# EAGLE board power electronics7 (EAGLE 9.2.2)
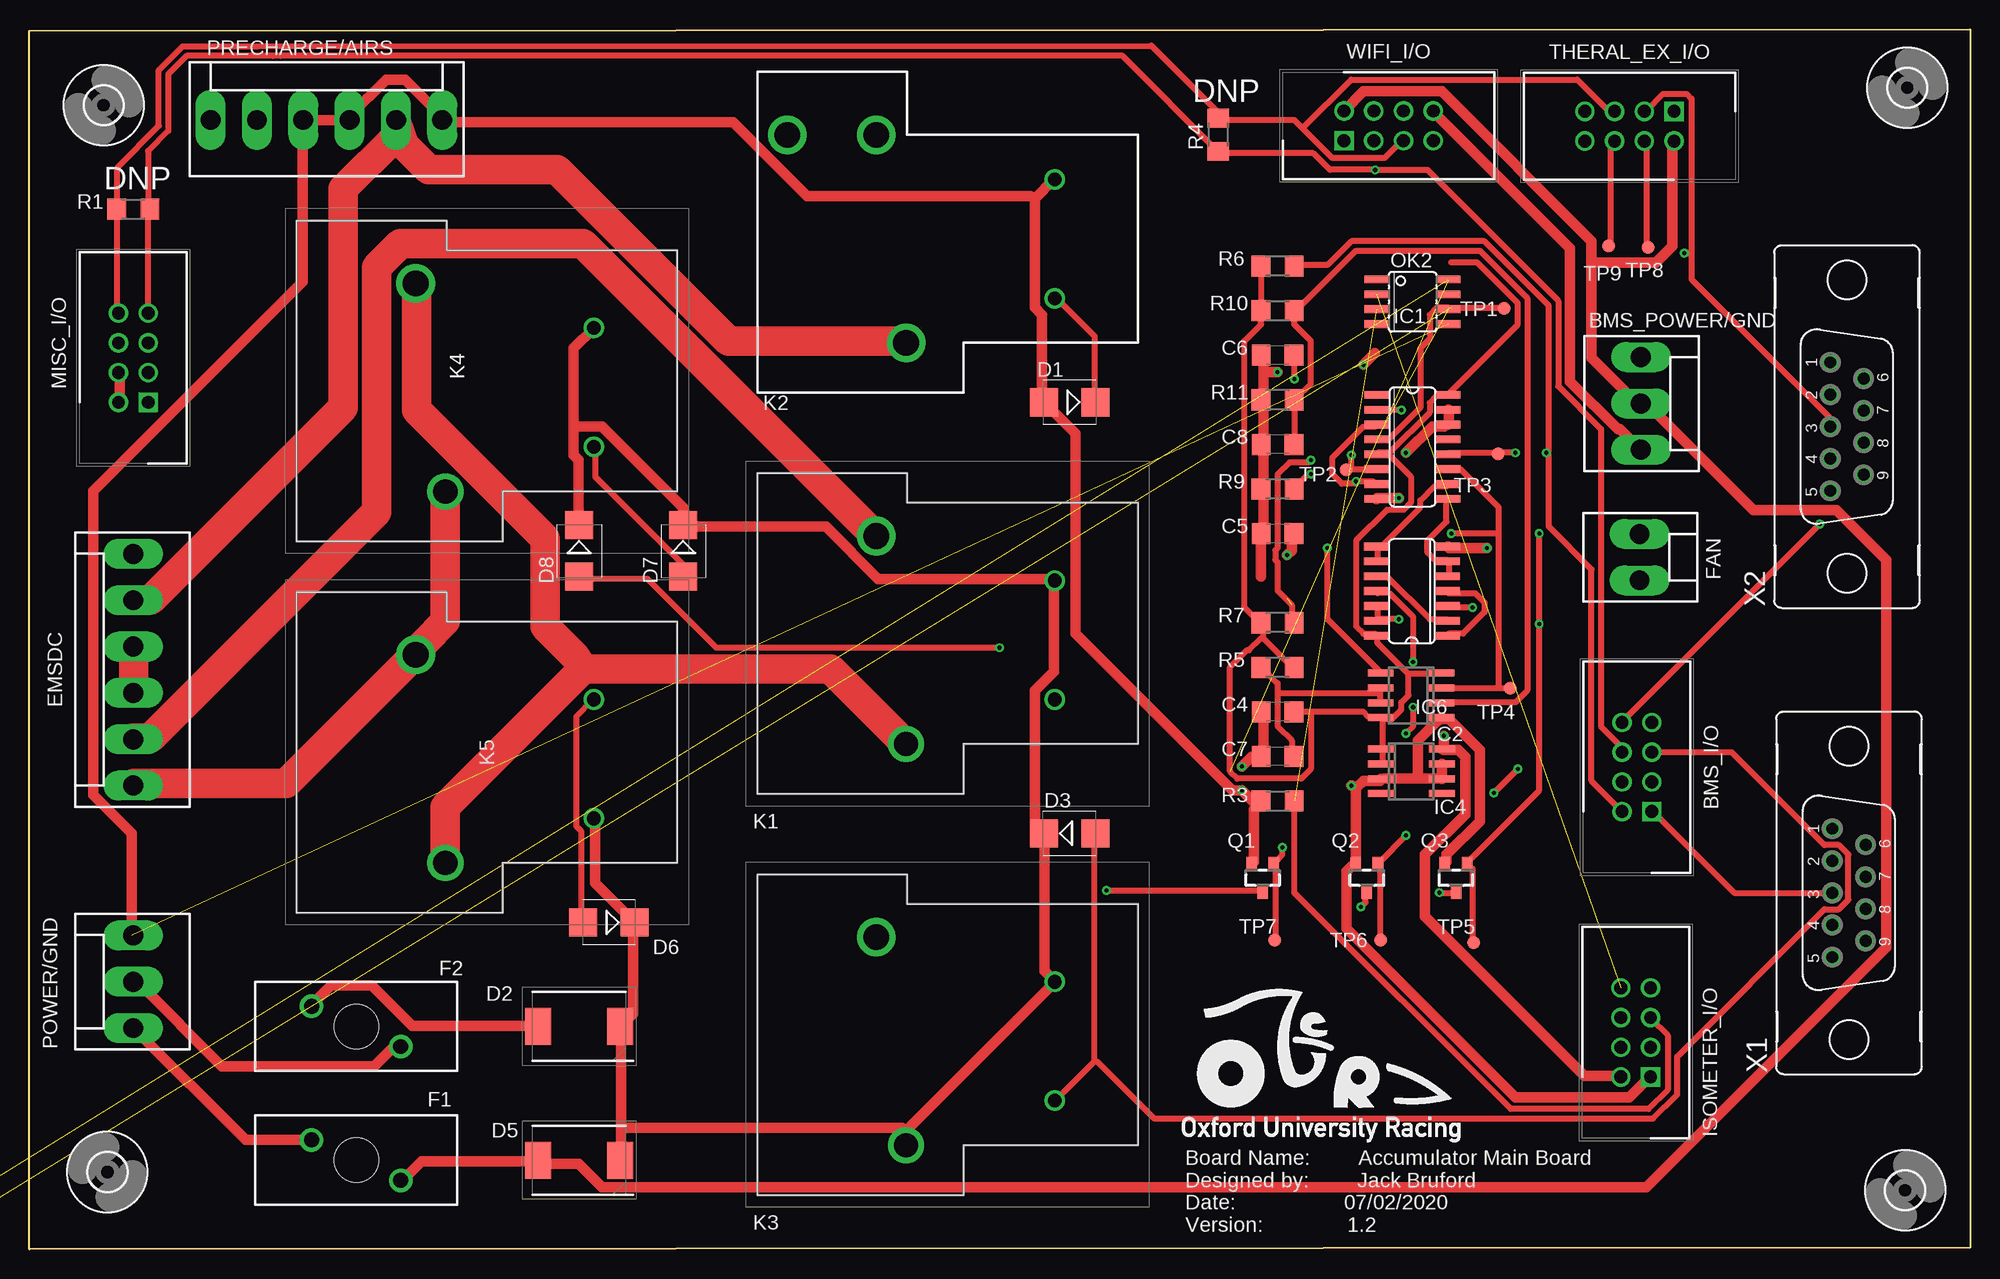
[diagram p0: board, top side]
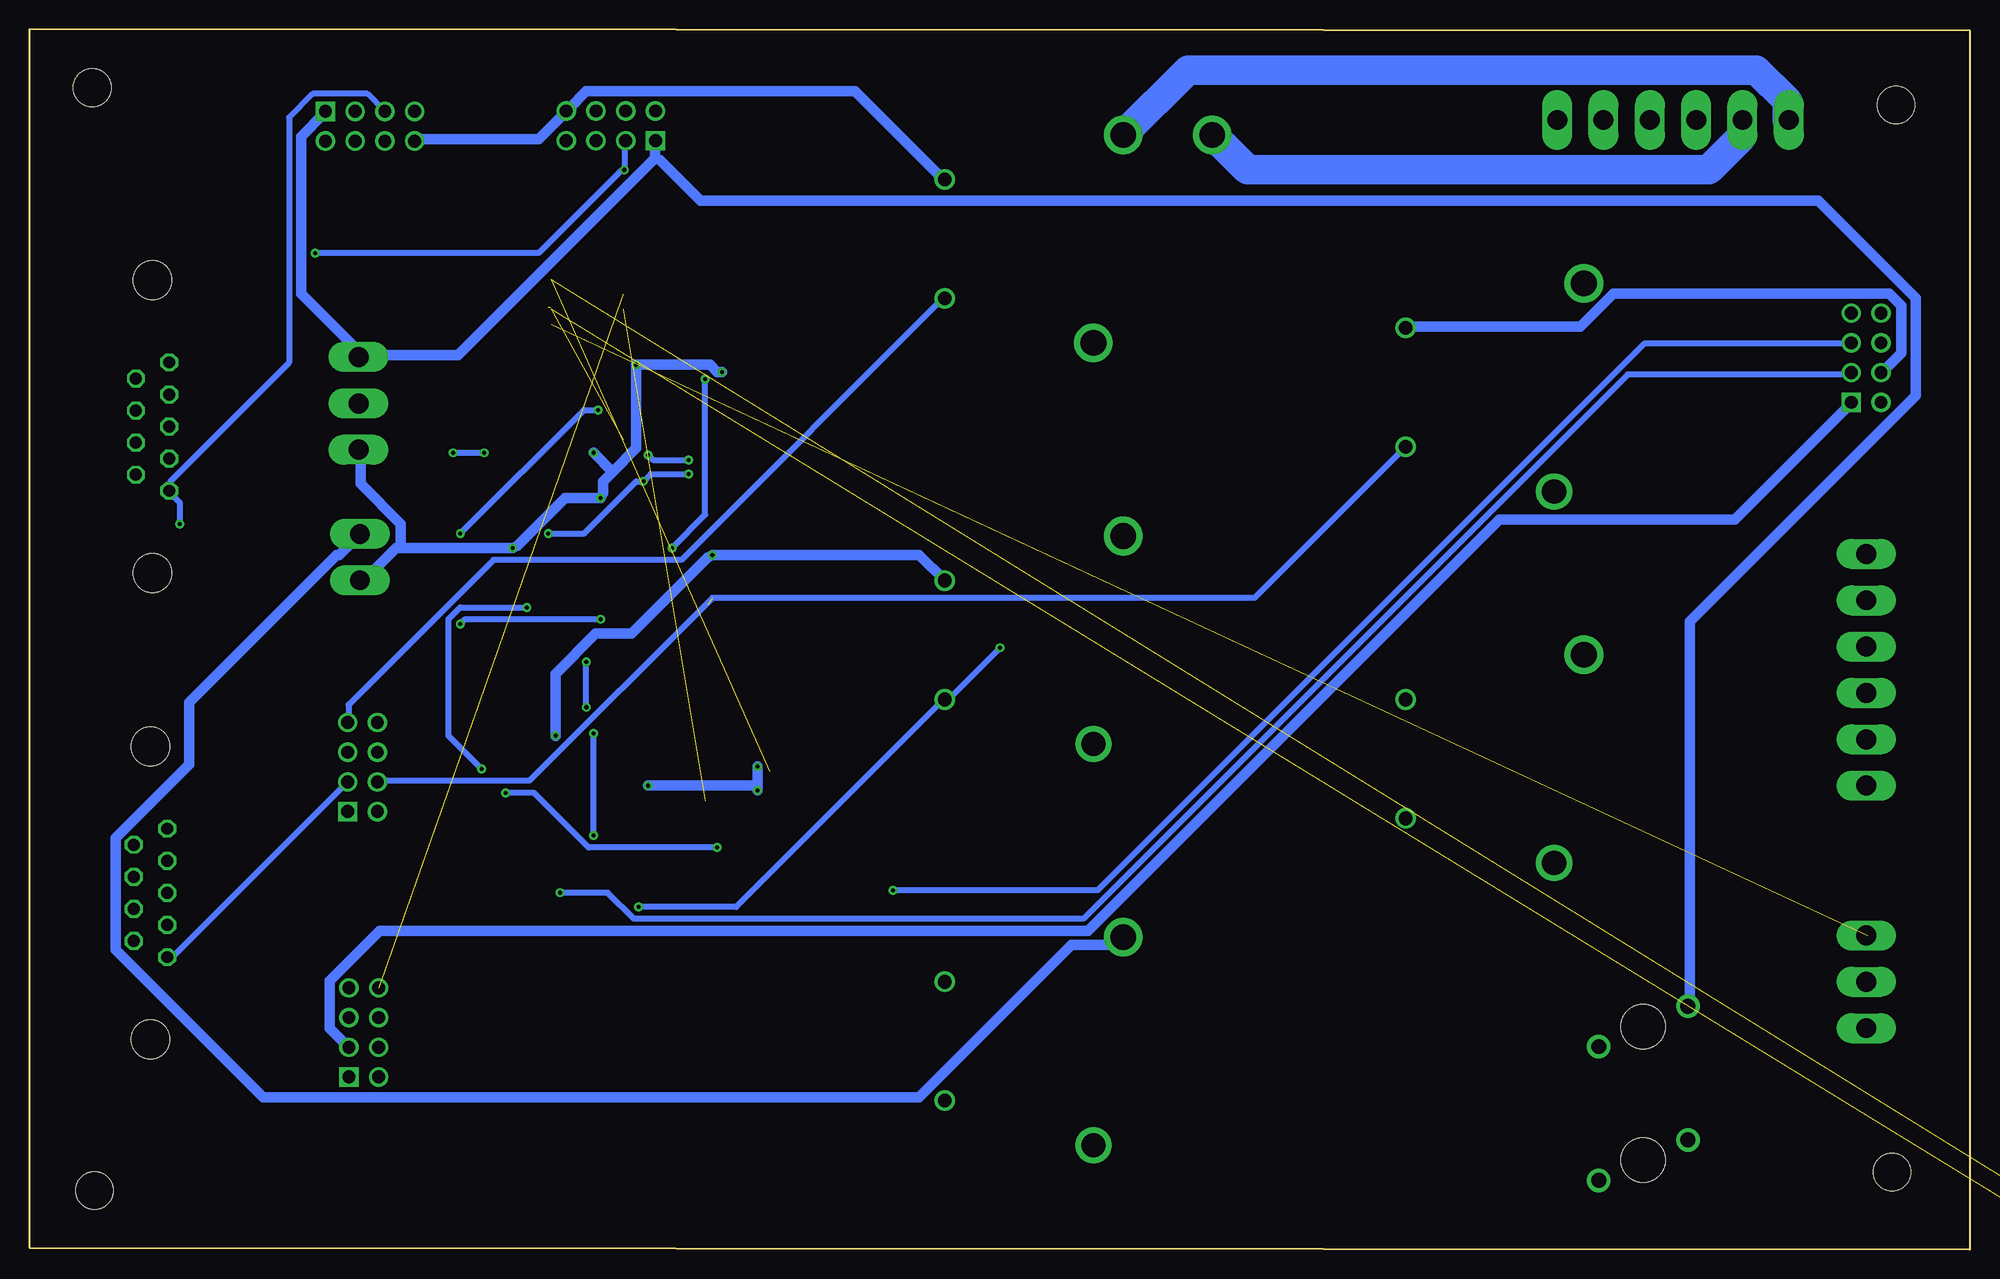
[diagram p1: board, bottom side, seen from below]

Size 165.87 x 104.27 mm. Coordinates in mm from the lower left corner, seen from the top.
Outline: 0,0 0,104.14 165.87,104.27 165.87,0.13 0,0
Copper layers (1*16): Top 0.035mm / dielectric 1.5mm / Bottom 0.035mm
Design rules "default *": minimum track width 6mil, minimum drill 0.35mm, track to track 12mil, track to pad 12mil, pad to pad 12mil, via to via 12mil, smd to smd 0mil, copper to edge 40mil, drill to drill 6mil, minimum pad ring 10mil, minimum via ring 8mil, stop-mask expansion 4mil, vias tented up to drill 0mil, thermal gap 10mil
Net classes: 0 default: width 0.508 mm; 1 GND: width 0.889 mm; 2 EMSDC: width 2.54 mm; 3 power: width 0.889 mm

## Footprints (pad centres in the part's own frame; a part is rotated, then mirrored left to right if it is on the bottom)
HDRV8W64P254_2X4_1778X895X915P = drill 1.1 pad 1.65 square: 1 0,0 | drill 1.1 pad 1.65: 2 0,2.54; 3 2.54,0; 4 2.54,2.54; 5 5.08,0; 6 5.08,2.54; 7 7.62,0; 8 7.62,2.54
KK-156-3 = drill 1.7 pad 2.184 long: 1 -3.96,0; 2 0,0; 3 3.96,0
C1206 = smd 1.6 x 1.8: 1 -1.4,0; 2 1.4,0
SMB = smd 2.4 x 2.4: A 2.2,0; C -2.2,0
DIOM7959X262N = smd 2.2 x 3.15: 1 -3.5,0; 2 3.5,0
KK-156-6 = drill 1.7 pad 2.184 long: 1 -9.9,0; 2 -5.94,0; 3 -1.98,0; 4 1.98,0; 5 5.94,0; 6 9.9,0
01530008 = drill 1.27 pad 2: 1 1.727,3.81; 2 -1.727,-3.81 | hole 3.785: 0,0
KK-156-2 = drill 1.7 pad 2.184 long: 1 -1.98,0; 2 1.98,0
3,2 = hole 3.2: 0,0
SO16 = smd 0.66 x 2.032: 1 -4.445,-3.073; 2 -3.175,-3.073; 3 -1.905,-3.073; 4 -0.635,-3.073; 5 0.635,-3.073; 6 1.905,-3.073; 7 3.175,-3.073; 8 4.445,-3.073; 9 4.445,3.073; 10 3.175,3.073; 11 1.905,3.073; 12 0.635,3.073; 13 -0.635,3.073; 14 -1.905,3.073; 15 -3.175,3.073; 16 -4.445,3.073
SO08 = smd 0.6 x 2.2: 1 -1.905,-2.6; 2 -0.635,-2.6; 3 0.635,-2.6; 4 1.905,-2.6; 5 1.905,2.6; 6 0.635,2.6; 7 -0.635,2.6; 8 -1.905,2.6
SOIC8 = smd 0.6 x 2.2: 1 -1.905,-2.6; 2 -0.635,-2.6; 3 0.635,-2.6; 4 1.905,-2.6; 5 1.905,2.6; 6 0.635,2.6; 7 -0.635,2.6; 8 -1.905,2.6
SO14 = smd 0.66 x 2.032: 1 -3.81,-3.073; 2 -2.54,-3.073; 3 -1.27,-3.073; 4 0,-3.073; 5 1.27,-3.073; 6 2.54,-3.073; 7 3.81,-3.073; 8 3.81,3.073; 9 2.54,3.073; 10 1.27,3.073; 11 0,3.073; 12 -1.27,3.073; 13 -2.54,3.073; 14 -3.81,3.073
T9AS1D1248T9A = drill 1.17 pad 1.755: 1 0,0; 2 -10.16,0 | drill 2.06 pad 3.09: 3 -13.97,12.7 | drill 2.19 pad 3.3: 4 3.81,15.24
T9AS1D12 = drill 2.19 pad 3.29: 1 -8.89,12.7; 2 8.89,15.24; 3 8.89,22.86 | drill 1.17 pad 1.77: 4 -5.08,0; 5 5.08,0
SOIC08 = smd 0.66 x 2.032: 1 -1.905,-3.073; 2 -0.635,-3.073; 3 0.635,-3.073; 4 1.905,-3.073; 5 1.905,3.073; 6 0.635,3.073; 7 -0.635,3.073; 8 -1.905,3.073
SOT23 = smd 0.9 x 1.2: 1 -0.95,-1.2; 2 0.95,-1.2; 3 0,1.2
R1206 = smd 1.6 x 1.803: 1 -1.422,0; 2 1.422,0
TP11R = smd 1.1 x 1.1: TP 0,0
F09V = drill 1.016 octagon: 1 5.486,1.422; 2 2.743,1.422; 3 0,1.422; 4 -2.743,1.422; 5 -5.486,1.422; 6 4.115,-1.422; 7 1.372,-1.422; 8 -1.372,-1.422; 9 -4.115,-1.422 | hole 3.302: -12.522,0; 12.522,0

## Placement (x,y rotation side)
BMS_I/O  T821108A1S100CEU  [HDRV8W64P254_2X4_1778X895X915P]  138.65,37.41 90 top
BMS_POWER/GND  [KK-156-3]  137.73,72.29 270 top
C4  3.3uF  [C1206]  106.68,45.93 180 top
C5  1uF  [C1206]  106.68,61.17 180 top
C6  0.1uF  [C1206]  106.68,76.41 180 top
C7  22uF  [C1206]  106.68,42.12 180 top
C8  10uF  [C1206]  106.68,68.79 180 top
D1  ES2D  [SMB]  88.9,72.39 180 top
D2  VS-30BQ100-M3_9AT  [DIOM7959X262N]  46.99,19.05 180 top
D3  ES2D  [SMB]  88.9,35.56 0 top
D5  VS-30BQ100-M3_9AT  [DIOM7959X262N]  46.99,7.62 180 top
D6  ES2D  [SMB]  49.53,27.94 180 top
D7  ES2D  [SMB]  55.88,59.69 270 top
D8  ES2D  [SMB]  46.99,59.69 270 top
EMSDC  [KK-156-6]  8.89,49.53 90 top
F1  01530008Z  [01530008]  27.94,7.62 270 top
F2  01530008Z  [01530008]  27.94,19.05 90 top
FAN  [KK-156-2]  137.61,59.16 270 top
H1  MOUNT-HOLE3.2  [3,2]  160.3,5.04 0 top
H2  MOUNT-HOLE3.2  [3,2]  160.49,99.28 0 top
H3  MOUNT-HOLE3.2  [3,2]  6.68,6.6 90 top
H4  MOUNT-HOLE3.2  [3,2]  6.35,97.79 0 top
IC1  4043D  [SO16]  118.21,68.58 270 top
IC2  SE555D  [SO08]  118.09,47.34 90 top
IC4  [SOIC8]  118.11,40.85 270 top
IC6  4011D  [SO14]  118.15,56.25 90 top
ISOMETER_I/O  T821108A1S100CEU  [HDRV8W64P254_2X4_1778X895X915P]  138.56,14.73 90 top
K1  T9AS1D12-48=T9A  [T9AS1D1248T9A]  87.63,57.15 90 top
K2  T9AS5D12-12=T9A  [T9AS1D12]  87.63,86.36 90 top
K3  T9AS1D12-48=T9A  [T9AS1D1248T9A]  87.63,22.86 90 top
K4  T9AS1D12-48=T9A  [T9AS1D1248T9A]  48.26,78.74 90 top
K5  T9AS1D12-48=T9A  [T9AS1D1248T9A]  48.26,46.99 90 top
MISC_I/O  T821108A1S100CEU  [HDRV8W64P254_2X4_1778X895X915P]  10.16,72.39 90 top
OK2  HCPL0453  [SOIC08]  118.21,80.98 270 top
POWER/GND  [KK-156-3]  8.89,22.86 90 top
PRECHARGE/AIRS  [KK-156-6]  25.4,96.52 0 top
Q1  BSS138  [SOT23]  105.41,31.75 180 top
Q2  BSS138  [SOT23]  114.3,31.75 180 top
Q3  BSS138  [SOT23]  121.92,31.75 180 top
R1  120  [R1206]  8.89,88.9 180 top
R3  2.2K  [R1206]  106.68,38.31 180 top
R4  120  [R1206]  101.6,95.25 90 top
R5  100K  [R1206]  106.68,49.74 0 top
R6  2.2K  [R1206]  106.68,84.03 0 top
R7  2.2K  [R1206]  106.68,53.55 0 top
R8  2.2K  [R1206]  -16.48,-3.18 0 top  (outside the outline)
R9  10K  [R1206]  106.68,64.98 0 top
R10  200K  [R1206]  106.68,80.22 180 top
R11  510K  [R1206]  106.68,72.6 0 top
THERAL_EX_I/O  T821108A1S100CEU  [HDRV8W64P254_2X4_1778X895X915P]  140.56,97.26 180 top
TP1  TPSTP11R  [TP11R]  126.02,80.43 0 top
TP2  TPSTP11R  [TP11R]  112.53,66.64 0 top
TP3  TPSTP11R  [TP11R]  125.52,67.99 0 top
TP4  TPSTP11R  [TP11R]  126.53,47.97 0 top
TP5  TPSTP11R  [TP11R]  123.44,26.19 0 top
TP6  TPSTP11R  [TP11R]  115.48,26.4 0 top
TP7  TPSTP11R  [TP11R]  106.43,26.44 0 top
TP8  TPSTP11R  [TP11R]  138.34,85.63 0 top
TP9  TPSTP11R  [TP11R]  134.97,85.76 0 top
WIFI_I/O  T821108A1S100CEU  [HDRV8W64P254_2X4_1778X895X915P]  112.36,94.75 0 top
X1  [F09V]  155.51,30.46 90 top
X2  [F09V]  155.33,70.31 90 top

## Library data of the parts
BMS_I/O ISOMETER_I/O MISC_I/O THERAL_EX_I/O WIFI_I/O = SamacSys_Parts; DESCRIPTION: HEADER, VERTICAL, 2.54MM, 8WAY Amphenol T821 Series, 2.54mm Pitch 8 Way 2 Row Straight PCB Header, Solder Termination, 3A; HEIGHT: 9.15mm; MANUFACTURER_NAME: Amphenol; MANUFACTURER_PART_NUMBER: T821108A1S100CEU; RS_PART_NUMBER: 8323569; RS_PRICE-STOCK: http://uk.rs-online.com/web/p/products/8323569
BMS_POWER/GND EMSDC FAN POWER/GND PRECHARGE/AIRS = con-molex; MF: MOLEX; OC_FARNELL: unknown; OC_NEWARK: unknown
C4-C8 = rcl; SPICEPREFIX: C
D1 D3 D6-D8 = diode
D2 D5 = SamacSys_Parts; DESCRIPTION: Vishay VS-30BQ100-M3/9AT SMT Schottky Diode, 100V 3A, 2-Pin DO-214AB; HEIGHT: 2.62mm; MANUFACTURER_NAME: Vishay; MANUFACTURER_PART_NUMBER: VS-30BQ100-M3/9AT; MOUSER_PART_NUMBER: 78-VS-30BQ100-M39AT; MOUSER_PRICE-STOCK: https://www.mouser.com/Search/Refine.aspx?Keyword=78-VS-30BQ100-M39AT
F1 F2 = SamacSys_Parts; ALLIED_NUMBER: 70184304; DESCRIPTION: Mini fuseholder,15A 32V Littelfuse 15A PCB Mount Fuse Holder Automotive Fuse, 32 V; HEIGHT: mm; MANUFACTURER_NAME: LITTELFUSE; MANUFACTURER_PART_NUMBER: 01530008Z; RS_PART_NUMBER: 3607317; RS_PRICE-STOCK: https://uk.rs-online.com/web/p/products/3607317
H1-H4 = holes
IC1 IC6 = 40xx
IC2 = linear
IC4 = linear-technology; MPN: LT1129CS8-5#PBF; OC_FARNELL: 1273576; OC_NEWARK: 57M2078
K1 K3-K5 = SamacSys_Parts; DESCRIPTION: SPST-NO PCB Mount Non-Latching Relay Through Hole, 48V dc; HEIGHT: 20.4mm; MANUFACTURER_NAME: TE Connectivity; MANUFACTURER_PART_NUMBER: T9AS1D12-48=T9A; RS_PART_NUMBER: 6802534P; RS_PRICE-STOCK: http://uk.rs-online.com/web/p/products/6802534P
K2 = SamacSys_Parts; ALLIED_NUMBER: R1111589; DESCRIPTION: PCB Relay SPDT 30A 12Vdc,thru hole SPDT PCB Mount Non-Latching Relay Through Hole, 12V dc; HEIGHT: mm; MANUFACTURER_NAME: TE Connectivity; MANUFACTURER_PART_NUMBER: T9AS5D12-12=T9A; RS_PART_NUMBER: 6802528; RS_PRICE-STOCK: https://uk.rs-online.com/web/p/products/6802528
OK2 = optocoupler; MF: AGILENT TECHNOLOGIES; MPN: HCPL-0453-000E; OC_FARNELL: 1505123; OC_NEWARK: 88H7766
Q1-Q3 = m-pad-2.1
R1 R3-R11 = rcl; SPICEPREFIX: R
TP1-TP9 = testpad
X1 X2 = con-subd; OC_FARNELL: unknown; OC_NEWARK: unknown

## Nets
+3V3: C4.1 IC1.5 IC1.16 IC2.4 IC2.8 IC4.1 IC4.2 IC6.14 OK2.8 R5.2 R6.1 R7.1 R8.1 R10.2
+12V [power]: C5.1 D2.1 D3.C D5.1 D6.C D7.C D8.C IC4.8 ISOMETER_I/O.2 K1.1 K3.1 K3.3 K4.1 K5.2 MISC_I/O.2 MISC_I/O.4
AMS_LED-: MISC_I/O.5 Q1.3
CAN1_H: BMS_I/O.1 X1.3
CAN1_L: BMS_I/O.3 X1.5
CAN2_H: BMS_I/O.6 MISC_I/O.7 R1.1 R4.1 THERAL_EX_I/O.3 WIFI_I/O.3 X2.3
CAN2_L: BMS_I/O.8 MISC_I/O.8 R1.2 R4.2 THERAL_EX_I/O.5 WIFI_I/O.5 X2.5
CHARGE_POWER [power]: BMS_POWER/GND.2 D5.2 F1.1 THERAL_EX_I/O.2 WIFI_I/O.2
CHARGE_SAFE: D6.A K5.1
CHASSIS_GND [GND]: ISOMETER_I/O.3 MISC_I/O.1
CHG_SAFE: BMS_I/O.2 IC1.12 R6.2 TP3.TP
DISCHARGE_ENABLE: BMS_I/O.4 D7.A IC1.6 K4.2 R7.2 TP2.TP
EMSDC_IMD+ [EMSDC]: K1.3 K4.4 K5.3
FAN+ [power]: FAN.1 K3.4
FAN_ENABLE: BMS_I/O.5 D3.A K3.2
GND [GND]: BMS_POWER/GND.3 C4.2 C5.2 C6.2 C7.2 C8.2 D1.A FAN.2 IC1.8 IC1.14 IC1.15 IC2.1 IC4.3 IC4.6 IC4.7 IC6.7 ISOMETER_I/O.1 K2.5 OK2.5 POWER/GND.3 PRECHARGE/AIRS.3 PRECHARGE/AIRS.4 PRECHARGE/AIRS.6 Q1.2 Q2.2 Q3.2 R3.2 R9.1 R11.1 THERAL_EX_I/O.8 WIFI_I/O.8
HIGHEST_TEMP: THERAL_EX_I/O.4 TP8.TP
IMD_COIL_OUT: D8.A K1.2 Q2.3
IMD_LED-: MISC_I/O.3 Q3.3
LOWEST_TEMP: THERAL_EX_I/O.6 TP9.TP
M_HS: ISOMETER_I/O.5
N$1 [EMSDC]: EMSDC.1 K4.3 K5.4
N$2 [power]: F2.2 POWER/GND.2
N$3 [EMSDC]: K2.2 PRECHARGE/AIRS.1
N$4 [power]: F1.2 POWER/GND.1
N$5: IC1.4 OK2.6 R8.2 TP1.TP
N$7: OK2.3 R3.1
N$8: IC1.2 IC6.12 IC6.13 Q3.1 TP5.TP
N$10: IC1.9 IC6.5 IC6.6
N$11 [EMSDC]: EMSDC.5 K2.1 PRECHARGE/AIRS.5
N$12 [EMSDC]: K2.3 PRECHARGE/AIRS.2
N$13: IC1.10 IC6.8 IC6.9
N$14: IC6.1 IC6.4
N$15 [EMSDC]: EMSDC.2 K1.4
N$17: C7.1 IC2.6 IC2.7 R5.1
N$19 [EMSDC]: EMSDC.3 EMSDC.4
N$20: IC6.2 IC6.10
N$21: IC6.3 Q1.1 TP7.TP
N$28: C8.1 IC2.2 R10.1 R11.2
N$32: C6.1 IC2.5
N$37: IC6.11 Q2.1 TP6.TP
OK_HS: ISOMETER_I/O.8 OK2.2
PRECHARGE_SELECT: BMS_I/O.7 D1.C K2.4
READY_POWER [power]: BMS_POWER/GND.1 D2.2 F2.1 THERAL_EX_I/O.1 WIFI_I/O.1
STARTUP_RESET: IC1.3 IC1.7 IC1.11 IC2.3 R9.2 TP4.TP

## Tracks (layer width: path | path; a pad name or v marks a point on that pad's centre or on a via)
+3V3  (2 unrouted)
  Top 0.508: R6.1 105.26,83.92 105.26,80.26 R10.2 105.26,80.06 105.26,79.05 103.83,77.62 103.83,54.86 105.05,53.65 R7.1 105.46,53.44 105.46,52.22 | 105.46,52.22 107.9,49.78 R5.2 | 117.86,49.17 115.21,51.82 115.21,52.43 IC6.14 115.01,52.63 114,52.63 113.39,53.24 113.39,60.55 116.03,63.2 117.45,63.2 118.06,63.8 118.06,66.04 116.23,67.87 116.23,68.07 | 117.86,49.17 120.5,49.17 IC2.4 | IC4.2 115.62,41.66 115.62,42.67 IC4.1 115.62,42.88 115.62,45.31 IC2.8 | 109.53,45.92 114,45.92 114.4,45.52 115.42,45.52 IC2.8 | 109.53,45.92 108.1,45.92 C4.1 | 117.86,49.17 117.86,47.35 117.25,46.74 117.25,46.13 116.43,45.31 115.82,45.31 IC2.8 | 116.23,68.07 115.21,68.07 IC1.5 | 116.23,68.07 119.69,71.53 119.69,72.34 120.29,72.95 121.11,72.95 IC1.16 121.31,73.15 127.2,79.05 127.2,80.87 123.75,84.33 121.51,84.33 | 109.53,45.92 109.53,41.05 108.71,40.23 103.23,40.23 102.62,40.84 102.62,49.78 104.04,51.21 104.24,51.21 105.26,52.22 105.46,52.22
+12V  (via drill 0.35)
  Top 0.889: MISC_I/O.2 7.72,72.54 7.72,74.78 MISC_I/O.4 | 46.53,70.31 46.53,77.01 K4.1 | 46.53,70.31 46.53,67.87 46.94,67.46 46.94,61.98 D8.C | 46.53,70.31 48.97,70.31 55.88,63.4 D7.C 56.29,61.77 68.07,61.77 72.54,57.3 87.17,57.3 K1.1 87.58,57.1 87.58,49.38 85.95,47.75 85.95,36.58 86.56,35.97 D3.C 86.77,35.56 86.77,23.77 87.58,22.96 K3.1 87.38,22.55 74.98,10.16 74.98,8.94 K3.3 74.57,10.36 50.6,10.36 | 120.9,42.67 122.12,42.67 122.73,42.06 122.73,37.19 119.28,33.73 119.28,28.45 132.89,14.83 135.94,14.83 ISOMETER_I/O.2 | 120.9,42.67 IC4.8 | 50.6,10.36 50.6,18.69 D2.1 50.6,19.1 51.61,20.12 51.61,27.84 D6.C 51.41,28.25 48.36,31.29 48.36,36.78 K5.2 | 50.6,10.36 50.6,7.72 D5.1 | v107.49,59.33 107.9,59.74 107.9,61.16 C5.1 | v120.9,43.89 120.9,42.67
  Bottom 0.889: MISC_I/O.4 7.52,74.98 5.89,76.61 5.89,80.67 6.91,81.69 30.48,81.69 33.33,78.84 48.16,78.84 K4.1 | K1.1 89.81,59.33 v107.49,59.33 107.9,59.13 114.4,52.63 117.45,52.63 120.9,49.17 v120.9,43.89
AMS_LED-  (via drill 0.35)
  Top 0.508: v92.05,30.68 105.26,30.68 Q1.3
  Bottom 0.508: v92.05,30.68 74.57,30.68 27.84,77.42 10.16,77.42 MISC_I/O.5
CAN1_H
  Top 0.508: X1.3 154.03,30.48 145.69,30.48 138.79,37.39 BMS_I/O.1
CAN1_L
  Bottom 0.508: X1.5 154.03,24.99 153.62,24.99 138.79,39.83 BMS_I/O.3
CAN2_H  (via drill 0.35)
  Top 0.508: 142.04,85.14 142.04,98.35 141.63,98.75 139.6,98.75 138.18,97.33 THERAL_EX_I/O.3 | 142.04,85.14 142.04,82.91 153.82,71.12 153.82,70.51 X2.3 | MISC_I/O.7 10.16,88.8 | 10.16,88.8 R1.1 | R4.1 101.6,93.67 109.73,93.67 111.15,92.25 v115.01,92.25 119.48,92.25 130.66,81.08 130.66,73.76 134.31,70.1 134.31,44.7 135.94,43.08 135.94,42.67 BMS_I/O.6 | 101.4,93.67 R4.1 | v141.43,85.14 142.04,85.14 | R4.1 93.43,102 21.45,102 | 21.45,102 20.8,102 | 21.45,102 21.44,101.99 13.44,101.99 11.88,100.44 11.88,95.59 10.16,93.87 10.16,88.8
  Bottom 0.508: WIFI_I/O.3 115.01,94.69 v115.01,92.25 115.21,92.25 122.33,85.14 v141.43,85.14 | 10.16,79.86 MISC_I/O.7
CAN2_L  (via drill 0.35)
  Top 0.508: v153.01,61.98 136.14,45.11 BMS_I/O.8 | MISC_I/O.8 7.52,80.06 7.52,88.8 R1.2 7.52,89 7.52,92.46 11.07,96.01 11.07,100.78 13.1,102.8 13.12,102.8 13.13,102.81 19.55,102.81 95.9,102.87 101.4,97.37 101.4,96.72 R4.2 101.6,96.52 108.1,96.52 108.81,95.81 | 108.81,95.81 111.35,93.27 115.82,93.27 117.25,94.69 WIFI_I/O.5 | 108.81,95.81 112.98,99.97 132.28,99.97 134.93,97.33 135.33,97.33 THERAL_EX_I/O.5
  Bottom 0.508: THERAL_EX_I/O.5 135.53,97.33 136.96,98.75 141.63,98.75 143.66,96.72 143.66,75.79 153.82,65.63 153.82,65.02 X2.5 153.82,64.62 153.01,63.8 v153.01,61.98
CHARGE_POWER
  Top 0.889: F1.1 31.9,5.89 33.53,7.52 43.48,7.52 D5.2 43.89,7.32 46.94,7.32 48.97,5.28 138.18,5.28 158.7,25.81 158.7,58.93 154.43,63.2 147.32,63.2 138.18,72.34 BMS_POWER/GND.2 137.57,72.14 133.5,76.2 133.5,84.33 | 133.5,84.33 133.5,86.16 120.7,98.96 114,98.96 112.37,97.33 WIFI_I/O.2 | 133.5,84.33 138.99,84.33 140.41,85.75 140.41,94.69 THERAL_EX_I/O.2
CHARGE_SAFE
  Top 0.508: D6.A 47.14,28.04 47.14,35.76 46.74,36.17 46.74,45.52 48.16,46.94 K5.1
CHASSIS_GND
  Bottom 0.889: ISOMETER_I/O.3 138.58,17.27 140.21,18.9 140.21,22.96 135.94,27.23 75.39,27.23 40.23,62.38 20.12,62.38 10.16,72.34 MISC_I/O.1
CHG_SAFE  (via drill 0.35)
  Top 0.508: IC1.12 121.31,68.07 125.37,68.07 TP3.TP 125.58,68.07 v127,68.07 | 129.84,68.07 129.84,61.77 133.5,58.12 133.5,40.03 135.94,37.59 BMS_I/O.2 | 129.84,68.07 129.84,80.67 124.36,86.16 112.98,86.16 110.95,84.12 108.1,84.12 R6.2 | v129.64,68.07 129.84,68.07
  Bottom 0.508: v129.64,68.07 v127,68.07
DISCHARGE_ENABLE  (via drill 0.35)  (1 unrouted)
  Top 0.508: D7.A 55.88,58.52 48.36,66.04 48.36,68.48 K4.2 | IC1.6 115.01,66.65 112.57,66.65 TP2.TP 112.98,66.85 v112.98,67.87 | v109.53,67.46 109.32,67.26 107.7,67.26 106.68,66.24 106.68,59.94 106.48,59.74 106.48,58.93 106.68,58.73 106.68,56.29 107.9,55.07 107.9,53.65 R7.2
  Bottom 0.508: K4.2 61.16,55.68 107.49,55.68 123.14,40.03 135.94,40.03 BMS_I/O.4 | v109.53,67.46 112.57,67.46 v112.98,67.87
EMSDC_IMD+
  Top 2.54: K5.3 35.56,37.8 47.35,49.58 | 47.35,49.58 68.48,49.58 74.78,43.28 K1.3 | K4.4 33.12,82.5 33.12,71.73 44.09,60.76 44.09,53.24 46.74,50.6 47.35,49.58
FAN+
  Bottom 0.889: FAN.1 137.77,60.96 139.4,59.33 139.6,59.33 152.2,46.74 152.2,41.45 158.5,35.15 158.5,25.6 145.9,13.01 89.81,13.01 76.81,26.01 73.15,26.01 72.54,26.62 K3.4
FAN_ENABLE
  Top 0.508: 91.03,16.05 91.03,35.56 D3.A | 91.03,16.05 87.78,12.8 K3.2 | BMS_I/O.5 138.79,42.47 145.49,42.47 153.42,34.54 154.63,34.54 155.45,33.73 155.45,29.87 154.63,29.06 153.42,29.06 140.82,16.46 140.82,13.21 138.79,11.18 96.11,11.18 91.24,16.05 91.03,16.05
GND  (via drill 0.35)  (1 unrouted)
  Top 0.889: POWER/GND.3 8.74,26.82 8.74,35.56 5.49,38.81 5.49,64.82 23.37,82.7 23.37,96.52 PRECHARGE/AIRS.3 PRECHARGE/AIRS.4 27.43,96.93 30.48,99.97 32.11,99.97 35.15,96.93 35.15,96.52 PRECHARGE/AIRS.6 35.56,96.32 60.15,96.32 66.45,90.02 85.55,90.02 85.95,89.81 | 120.7,45.31 121.31,45.31 123.95,42.67 123.95,36.58 121.11,33.73 121.11,33.12 Q3.2 | 120.7,45.31 IC2.1 | C4.2 105.46,45.92 105.46,42.27 C7.2 104.85,42.06 104.44,42.06 v103.63,41.25 | Q1.2 104.65,33.12 104.65,37.59 105.26,38.2 R3.2 104.65,38.2 v103.63,39.22 102.82,39.22 89.41,52.63 89.41,69.7 86.97,72.14 D1.A 86.56,72.54 86.56,79.86 85.95,80.47 85.95,89.81 | IC4.7 120.7,41.45 120.7,40.23 IC4.6 120.29,40.23 118.67,40.23 | 113.39,39.42 113.39,33.12 Q2.2 112.98,32.72 112.57,32.31 112.57,27.43 127,13.01 136.75,13.01 138.38,14.63 ISOMETER_I/O.1 | 113.39,39.42 114,40.03 115.42,40.03 IC4.3 115.82,40.23 118.67,40.23 | v112.98,39.62 113.39,39.42 | 118.67,40.23 118.67,43.48 120.29,45.11 120.7,45.31 | 105.46,74.98 105.46,72.75 R11.1 105.46,72.34 105.46,69.09 C8.2 105.46,68.68 105.46,65.23 R9.1 105.46,64.82 105.46,61.37 C5.2 105.26,60.76 105.26,57.51 | 105.46,74.98 105.46,76.4 C6.2 | IC1.15 121.31,71.73 121.31,70.51 IC1.14 120.9,70.31 119.89,70.31 v117.65,68.07 | v124.56,59.94 121.31,59.94 IC6.7 | v117.04,64.21 115.21,64.21 IC1.8 | v114,75.59 115.01,76.61 | v106.68,74.98 105.46,74.98 | 85.95,89.81 87.58,91.44 K2.5 | BMS_POWER/GND.3 137.57,68.48 135.94,70.1 135.74,70.1 131.67,74.17 131.67,85.55 120.09,97.13 WIFI_I/O.8
  Bottom 0.889: v103.63,39.22 103.63,39.62 | 103.63,39.62 v103.63,41.25 | v112.98,39.62 103.63,39.62 | 134.11,59.94 134.52,59.94 137.16,57.3 137.57,57.3 FAN.2 | 134.11,59.94 v124.56,59.94 124.16,60.15 120.09,64.21 v117.04,64.21 116.84,64.62 116.84,65.63 116.03,66.45 | 116.03,66.45 114,68.48 v114,75.59 107.7,75.59 107.09,74.98 v106.68,74.98 | 116.03,66.45 v117.65,68.07 | 134.11,59.94 134.11,61.98 137.57,65.43 137.57,68.28 BMS_POWER/GND.3 | THERAL_EX_I/O.8 132.89,94.89 122.33,94.89 120.09,97.13 WIFI_I/O.8 119.69,97.54 118.26,98.96 95.3,98.96 87.78,91.44 K2.5
HIGHEST_TEMP
  Top 0.508: TP8.TP 138.18,85.75 138.18,94.69 THERAL_EX_I/O.4
IMD_COIL_OUT  (via drill 0.35)
  Top 0.508: v113.79,29.26 114.2,29.67 114.2,30.48 Q2.3 | v82.91,51.41 58.73,51.41 52.83,57.3 47.14,57.3 D8.A
  Bottom 0.508: v113.79,29.26 105.46,29.26 87.78,46.94 K1.2 87.38,46.94 v82.91,51.41
IMD_LED-  (via drill 0.35)
  Top 0.508: v120.5,30.48 121.92,30.48 Q3.3
  Bottom 0.508: v120.5,30.48 116.43,30.48 114.2,28.25 75.79,28.25 29.26,74.78 10.16,74.78 MISC_I/O.3
LOWEST_TEMP
  Top 0.508: TP9.TP 135.13,85.95 135.13,94.49 135.33,94.69 THERAL_EX_I/O.6
M_HS
  Top 0.508: 108.1,38.2 108.1,30.48 126.59,11.99 138.38,11.99 140,13.61 140,18.29 138.58,19.71 ISOMETER_I/O.5
N$1
  Top 2.54: EMSDC.1 8.94,39.83 21.95,39.83 32.92,50.8 K5.4 33.73,51.82 35.56,53.65 K4.3
N$2
  Top 0.889: F2.2 31.7,17.27 31.09,17.27 29.46,15.65 16.46,15.65 9.35,22.76 8.94,22.76 POWER/GND.2
N$3
  Bottom 2.54: K2.2 66.85,100.79 18.29,100.79 15.65,98.15 15.65,96.52 PRECHARGE/AIRS.1
N$4
  Top 0.889: F1.2 18.49,9.35 8.94,18.9 POWER/GND.1
N$5  (3 unrouted)
  Top 0.508: 121.51,80.47 125.98,80.47 TP1.TP | 121.31,80.47 120.29,80.47 119.69,79.86 119.69,77.83 118.87,77.01 118.87,71.93 116.23,69.29 115.21,69.29 IC1.4
N$7  (1 unrouted)
N$8  (via drill 0.35)
  Top 0.508: IC6.12 115.21,54.86 115.21,53.85 IC6.13 115.42,53.85 v117.04,53.85 | TP5.TP 123.34,26.21 123.34,32.51 122.94,32.92 Q3.1 122.94,33.12 129.03,39.22 v129.03,53.44 v129.03,61.16 | v117.25,71.73 115.21,71.73 IC1.2
  Bottom 0.508: v117.25,71.73 118.47,71.73 v129.03,61.16 | v117.04,53.85 128.63,53.85 v129.03,53.44
N$10
  Top 0.508: IC6.5 121.31,57.71 121.31,58.73 IC6.6 121.11,58.93 120.09,58.93 119.48,59.54 119.48,60.55 121.11,62.18 121.11,64.01 IC1.9
N$11
  Top 2.54: EMSDC.5 8.94,55.47 10.36,55.47 26.82,71.93 26.82,90.63 31.29,95.1 31.29,96.52 PRECHARGE/AIRS.5 32.11,94.28 34.14,92.25 45.11,92.25 59.74,77.62 74.78,77.62 K2.1
N$12
  Bottom 2.54: K2.3 61.77,92.25 22.35,92.25 19.51,95.1 19.51,96.52 PRECHARGE/AIRS.2
N$13
  Top 0.508: IC6.9 115.21,58.93 115.21,59.94 IC6.8 115.42,59.94 118.87,63.4 118.87,64.01 120.09,65.23 121.11,65.23 IC1.10
N$14
  Top 0.508: IC6.1 121.31,52.63 122.53,52.63 124.36,54.46 124.36,55.27 123.55,56.08 121.31,56.08 IC6.4
N$15
  Top 2.54: EMSDC.2 8.94,43.69 10.36,43.69 29.67,62.99 29.67,83.92 31.7,85.95 47.35,85.95 72.34,60.96 K1.4
N$17
  Top 0.508: 115.42,47.55 115.42,47.95 IC2.6 | 115.42,47.55 115.42,46.74 IC2.7 | 106.68,47.55 106.68,48.36 105.46,49.58 R5.1 | 106.68,47.55 106.68,44.7 107.9,43.48 107.9,42.27 C7.1 | 106.68,47.55 115.42,47.55
N$19
  Top 2.54: EMSDC.3 8.94,47.75 8.94,51.41 EMSDC.4
N$20
  Top 0.508: IC6.2 121.11,53.85 119.69,53.85 116.03,57.51 115.21,57.51 IC6.10
N$21  (via drill 0.35)
  Top 0.508: TP7.TP 106.48,26.62 106.48,32.92 Q1.1 106.48,33.12 107.09,33.73 v107.09,34.34 | v123.34,54.86 121.31,54.86 IC6.3 | v125.17,39.01 v127.2,41.05
  Bottom 0.508: v123.34,54.86 129.03,54.86 130.05,53.85 130.05,43.89 v127.2,41.05 | v125.17,39.01 122.73,39.01 118.06,34.34 v107.09,34.34
N$28
  Top 0.508: C8.1 108.1,68.89 108.1,72.54 R11.2 108.31,72.75 109.53,73.97 109.53,77.62 108.1,79.05 108.1,80.06 R10.1 108.31,80.26 113.39,85.34 123.95,85.34 128.02,81.28 128.02,47.75 127,46.74 120.7,46.74 IC2.2
N$32  (via drill 0.35)
  Top 0.508: v108.1,74.37 108.1,76.4 C6.1 | v110.95,59.94 110.95,53.85 115.42,49.38 IC2.5
  Bottom 0.508: v108.1,74.37 108.1,62.79 v110.95,59.94
N$37  (via drill 0.35)
  Top 0.508: TP6.TP 115.42,26.42 115.42,32.92 Q2.1 115.42,33.12 v117.65,35.36 | v118.26,50.19 118.26,54.05 116.23,56.08 115.21,56.08 IC6.11 | v118.26,46.33 118.26,44.7 v117.65,44.09
  Bottom 0.508: v118.26,46.33 v118.26,50.19 | v117.65,35.36 v117.65,44.09
OK_HS  (1 unrouted)
PRECHARGE_SELECT
  Top 0.508: D1.C 91.03,72.54 91.03,78.03 87.78,81.28 K2.4
  Bottom 0.508: BMS_I/O.7 138.58,45.11 138.58,46.53 126.19,58.93 110.13,58.93 87.78,81.28 K2.4
READY_POWER
  Top 0.889: D2.2 43.48,19.1 32.72,19.1 29.26,22.55 25.81,22.55 24.18,20.93 F2.1
  Bottom 0.889: 112.37,93.27 112.37,94.69 WIFI_I/O.1 | 112.37,93.27 129.24,76.4 137.57,76.4 BMS_POWER/GND.1 137.77,76.81 142.65,81.69 142.65,95.1 140.61,97.13 THERAL_EX_I/O.1 | F2.1 23.98,20.93 23.98,53.65 4.67,72.95 4.67,81.28 13.01,89.61 108.51,89.61 111.96,93.07 112.37,93.27
STARTUP_RESET  (via drill 0.35)
  Top 0.508: v109.53,66.24 109.32,66.24 108.1,65.02 R9.2 | IC1.7 115.01,65.43 114.81,65.63 v113.39,65.63 113.39,65.43 112.17,65.43 111.35,66.24 111.35,67.67 114,70.31 115.01,70.31 IC1.3 | 125.58,47.95 120.7,47.95 IC2.3 | 125.58,47.95 126.39,47.95 TP4.TP | 125.58,47.95 125.58,61.16 | 125.58,61.16 125.58,63.4 122.33,66.65 121.31,66.65 IC1.11 | 125.58,61.16 v121.51,61.16
  Bottom 0.508: v109.53,66.24 112.78,66.24 v113.39,65.63 114,65.63 118.47,61.16 v121.51,61.16

## Text on the board
tPlace: DNP | DNP | Board Name: Accumulator Main Board / Designed by: Jack Bruford / Date: 07/02/2020 / Version: 1.2